# EAGLE board TLC5940Driver (EAGLE 7.2.0)
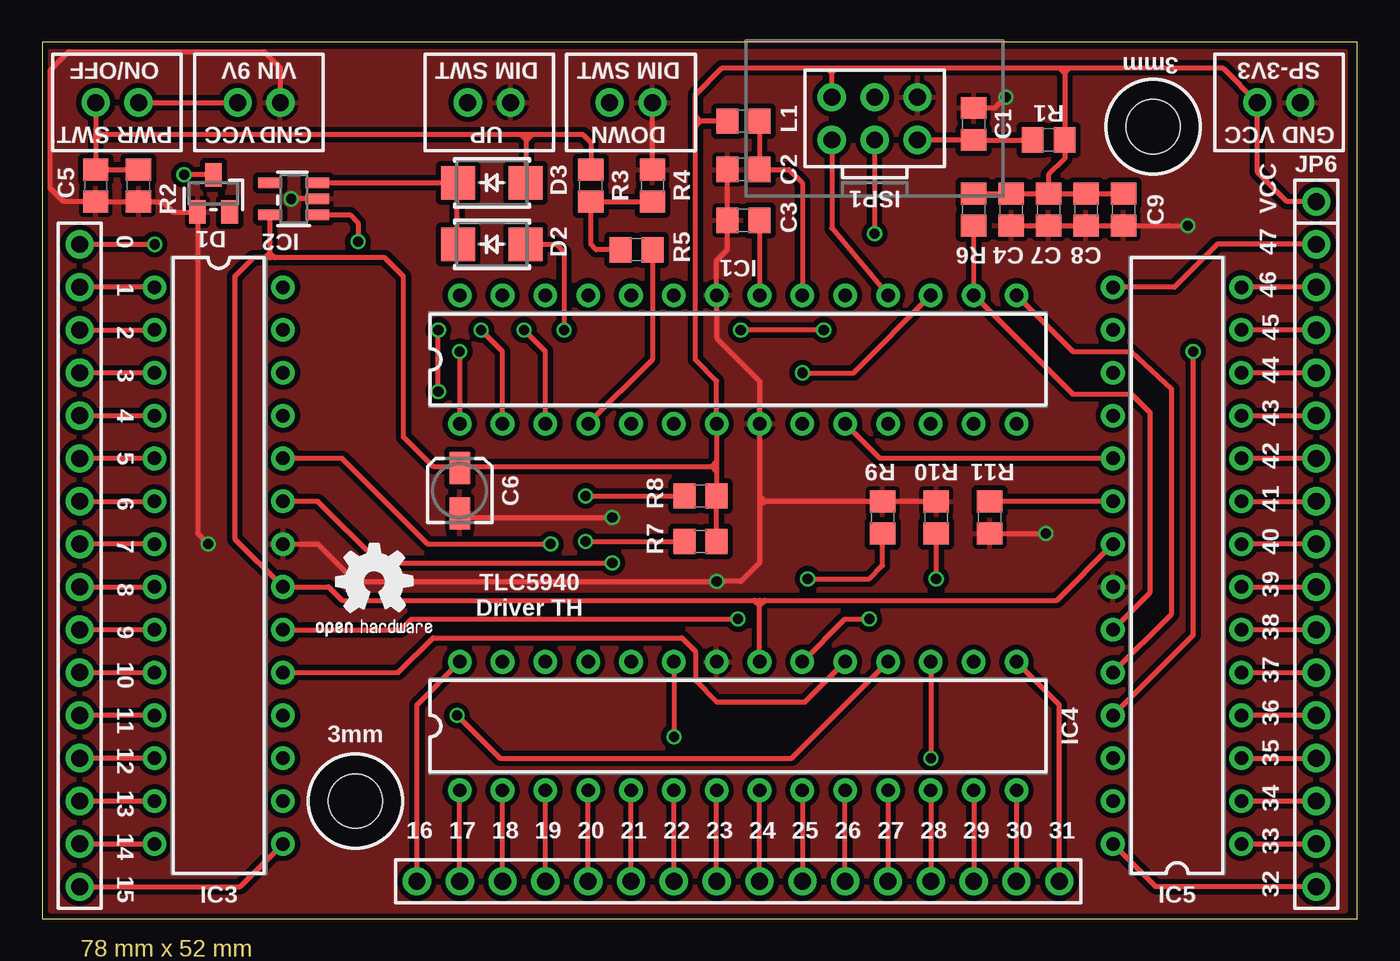
[diagram p0: board, top side]
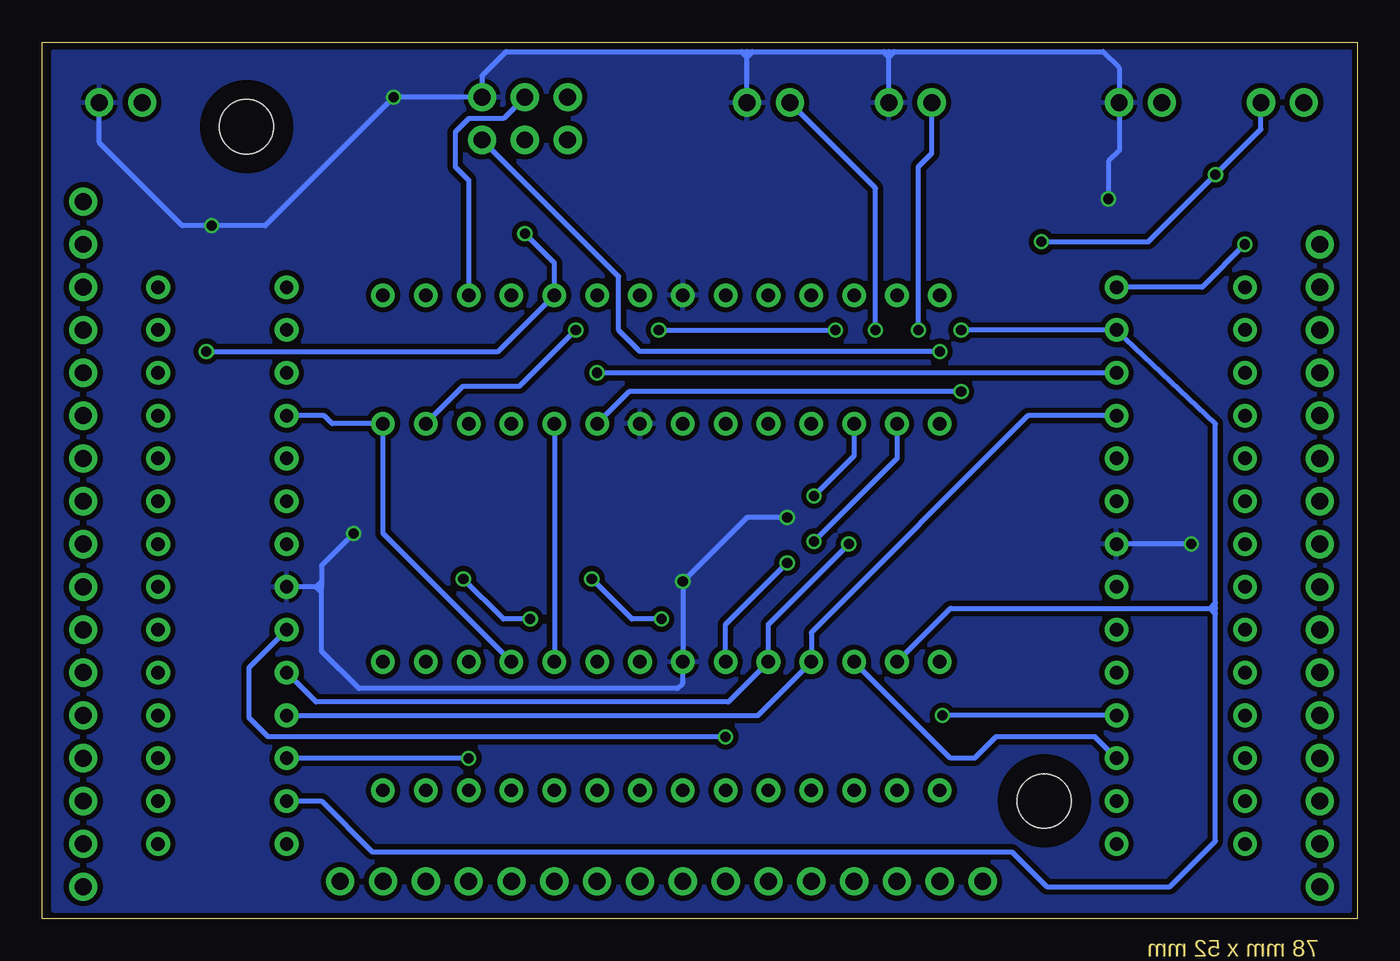
[diagram p1: board, bottom side, seen from below]

Size 78 x 52 mm. Coordinates in mm from the lower left corner, seen from the top.
Outline: 0,0 78,0 78,52 0,52 0,0
Copper layers (1*16): Top 0.018mm / dielectric 1.55mm / Bottom 0.018mm
Design rules "eC_2Layer_PClass6_BaseCopperO18_DNE": minimum track width 0.15mm, minimum drill 0.35mm, track to track 0.15mm, track to pad 0.15mm, pad to pad 0.15mm, via to via 0.15mm, smd to smd 0mil, copper to edge 0.25mm, drill to drill 0.35mm, minimum pad ring 0.175mm, minimum via ring 0.125mm, stop-mask expansion 0mil, vias tented up to drill 0.45mm, thermal gap 0.25mm
Holes 3.2 mm at 65.88,46.99 18.57,6.99
tRestrict: area 16.2,4.6 to 21,9.4; area 63.5,44.6 to 68.3,49.4
bRestrict: area 63.5,44.6 to 68.3,49.4; area 16.2,4.6 to 21,9.4

## Footprints (pad centres in the part's own frame; a part is rotated, then mirrored left to right if it is on the bottom)
P-0805 = smd 1.3 x 1.5: 1 -0.95,0; 2 0.95,0
P-CAPNICHICON-3MM = smd 1.2 x 1.9: 1 0,1.349; 2 0,-1.349
P-SOT23-3 = smd 1 x 1.4: 1 -0.95,-1.1; 2 0.95,-1.1; 3 0,1.1
P-SMA = smd 2 x 2: A -2,0; K 2,0
P-DIL28 = drill 0.8 pad 1.4: 1 -16.51,-3.81; 2 -13.97,-3.81; 3 -11.43,-3.81; 4 -8.89,-3.81; 5 -6.35,-3.81; 6 -3.81,-3.81; 7 -1.27,-3.81; 8 1.27,-3.81; 9 3.81,-3.81; 10 6.35,-3.81; 11 8.89,-3.81; 12 11.43,-3.81; 13 13.97,-3.81; 14 16.51,-3.81; 15 16.51,3.81; 16 13.97,3.81; 17 11.43,3.81; 18 8.89,3.81; 19 6.35,3.81; 20 3.81,3.81; 21 1.27,3.81; 22 -1.27,3.81; 23 -3.81,3.81; 24 -6.35,3.81; 25 -8.89,3.81; 26 -11.43,3.81; 27 -13.97,3.81; 28 -16.51,3.81
P-SOT23-5E = smd 0.6 x 1.4: 1 -0.95,-1.4; 2 0,-1.4; 3 0.95,-1.4; 4 0.95,1.4; 5 -0.95,1.4
P-AVRISPSHROUDED = drill 1 pad 1.676: GND 2.54,1.27; MISO -2.54,-1.27; MOSI 0,1.27; RST 2.54,-1.27; SCK 0,-1.27; VCC -2.54,1.27
P-JST-XH-1X02 = drill 1 pad 1.676: 1 -1.27,0; 2 1.27,0
P-1X16 = drill 1 pad 1.676: 1 -19.05,0; 2 -16.51,0; 3 -13.97,0; 4 -11.43,0; 5 -8.89,0; 6 -6.35,0; 7 -3.81,0; 8 -1.27,0; 9 1.27,0; 10 3.81,0; 11 6.35,0; 12 8.89,0; 13 11.43,0; 14 13.97,0; 15 16.51,0; 16 19.05,0
P-1X01 = drill 1 pad 1.676: 1 0,0
P-JST-XH-1X02-VERT = drill 1 pad 1.676: 1 -1.27,0; 2 1.27,0

## Placement (x,y rotation side)
C1  100nF  [P-0805]  55.24,47.15 90 top
C2  100nF  [P-0805]  41.59,44.45 180 top
C3  100nF  [P-0805]  41.59,41.43 180 top
C4  100nF  [P-0805]  57.47,42.07 270 top
C5  100nF  [P-0805]  3.17,43.5 270 top
C6  2.2uF  [P-CAPNICHICON-3MM]  24.77,25.4 0 top
C7  100nF  [P-0805]  59.69,42.07 270 top
C8  100nF  [P-0805]  61.91,42.07 270 top
C9  100nF  [P-0805]  64.14,42.07 270 top
D1  [P-SOT23-3]  10.16,43.02 0 top
D2  MBRA140  [P-SMA]  26.67,40.01 180 top
D3  MBRA140  [P-SMA]  26.67,43.66 180 top
GOLD_ORB_SM1  OSHWLOGO_GOLD_ORB_SM  [OSHW2]  15.88,15.72 0 top
IC1  ATMEGA88PA  [P-DIL28]  41.27,33.18 0 top
IC2  SPX3819  [P-SOT23-5E]  14.92,42.7 90 top
IC3  TLC5940  [P-DIL28]  10.48,20.95 270 top
IC4  TLC5940  [P-DIL28]  41.27,11.43 0 top
IC5  TLC5940  [P-DIL28]  67.31,20.95 90 top
ISP1  [P-AVRISPSHROUDED]  49.37,47.47 0 top
JP1  [P-JST-XH-1X02]  12.86,48.42 180 top
JP2  [P-JST-XH-1X02]  73.34,48.42 0 top
JP3  [P-1X16]  2.22,20.95 270 top
JP4  [P-1X16]  41.27,2.22 0 top
JP5  [P-1X16]  75.56,20.95 90 top
JP6  [P-1X01]  75.56,42.55 0 top
L1  [P-0805]  41.59,47.31 180 top
R1  4K7  [P-0805]  59.69,46.2 0 top
R2  100K  [P-0805]  5.71,43.5 90 top
R3  27K  [P-0805]  32.54,43.5 90 top
R4  15K  [P-0805]  36.2,43.5 270 top
R5  150R  [P-0805]  35.24,39.69 0 top
R6  10K  [P-0805]  55.24,42.07 90 top
R7  10K  [P-0805]  39.05,22.38 0 top
R8  10K  [P-0805]  39.05,25.08 0 top
R9  7K8  [P-0805]  49.85,23.81 270 top
R10  7K8  [P-0805]  53.02,23.81 270 top
R11  7K8  [P-0805]  56.2,23.81 90 top
SW1  [P-JST-XH-1X02-VERT]  4.45,48.42 180 top
SW2  [P-JST-XH-1X02-VERT]  34.92,48.42 0 top
SW3  [P-JST-XH-1X02-VERT]  26.51,48.42 0 top

## Library data of the parts
C1-C9 D1-D3 IC1-IC5 ISP1 JP1-JP6 L1 R1-R11 SW1-SW3 = dn-electronics
GOLD_ORB_SM1 = bfl

## Nets
GND: C1.2 C2.2 C3.2 C4.2 C5.2 C6.2 C7.2 C8.2 C9.2 D1.1 IC1.8 IC1.22 IC2.2 IC3.22 IC4.22 IC5.22 ISP1.GND JP1.1 JP2.2 R2.1 R4.1 R9.1 R10.1 R11.1 SW2.2 SW3.2
N$1: D1.3 IC2.1 JP1.2 SW1.1
N$2: C5.1 D3.A R2.2 R3.2 SW1.2
N$3: IC3.28 JP3.1
N$4: D2.K D3.K IC2.3
N$5: IC3.1 JP3.2
N$6: IC3.2 JP3.3
N$7: IC3.3 JP3.4
N$8: IC3.4 JP3.5
N$9: IC3.5 JP3.6
N$10: IC3.6 JP3.7
N$11: IC3.7 JP3.8
N$12: IC3.8 JP3.9
N$13: IC3.9 JP3.10
N$14: IC3.10 JP3.11
N$15: IC3.11 JP3.12
N$16: IC3.12 JP3.13
N$17: IC3.13 JP3.14
N$18: IC3.14 JP3.15
N$19: IC3.15 JP3.16
N$20: IC4.28 JP4.1
N$21: IC4.1 JP4.2
N$22: IC4.2 JP4.3
N$23: IC4.3 JP4.4
N$24: IC4.4 JP4.5
N$25: IC4.5 JP4.6
N$26: IC4.6 JP4.7
N$27: IC4.7 JP4.8
N$28: IC4.8 JP4.9
N$29: IC4.9 JP4.10
N$30: IC4.10 JP4.11
N$31: IC4.11 JP4.12
N$32: IC4.12 JP4.13
N$33: IC4.13 JP4.14
N$34: IC4.14 JP4.15
N$35: IC4.15 JP4.16
N$36: IC5.28 JP5.1
N$37: IC5.1 JP5.2
N$38: IC5.2 JP5.3
N$39: IC5.3 JP5.4
N$40: IC5.4 JP5.5
N$41: IC5.5 JP5.6
N$42: IC5.6 JP5.7
N$43: IC5.7 JP5.8
N$44: IC5.8 JP5.9
N$45: IC5.9 JP5.10
N$46: IC5.10 JP5.11
N$47: IC5.11 JP5.12
N$48: IC5.12 JP5.13
N$49: IC5.13 JP5.14
N$50: IC5.14 JP5.15
N$51: IC5.15 JP5.16
N$52: IC1.16 IC3.23 IC4.23 IC5.23 R6.1
N$53: D2.A IC1.13
N$54: IC1.2 R7.1 SW3.1
N$55: C1.1 IC1.1 ISP1.RST R1.1
N$56: C2.1 IC1.20 L1.1
N$57: C3.1 IC1.21
N$58: IC1.19 IC3.25 IC4.25 IC5.25 ISP1.SCK
N$59: IC1.18 ISP1.MISO
N$60: IC1.17 IC3.26 ISP1.MOSI
N$62: IC1.4 R5.2
N$63: IC1.3 R8.1 SW2.1
N$64: IC5.20 R11.2
N$65: IC3.17 IC4.26
N$66: IC4.17 IC5.26
N$67: IC1.15 IC3.24 IC4.24 IC5.24
N$68: IC1.14 IC3.18 IC4.18 IC5.18
N$69: IC1.10 IC3.19 IC4.19 IC5.19
N$70: IC1.9 IC3.27 IC4.27 IC5.27
N$72: IC4.20 R10.2
N$73: R3.1 R4.2 R5.1
N$74: IC3.20 R9.2
VCC: C4.1 C6.1 C7.1 C8.1 C9.1 IC1.7 IC2.5 IC3.21 IC4.21 IC5.21 ISP1.VCC JP2.1 JP6.1 L1.2 R1.2 R6.2 R7.2 R8.2

## Tracks (layer width: path | path; a pad name or v marks a point on that pad's centre or on a via)
GND  (via drill 0.6)
  Top 0.305: C6.2 24.77,23.81 v33.81,23.81 | C2.2 C3.2 40.64,39.69 40.01,39.05 IC1.22 40.01,34.45 42.55,31.91 IC1.8 42.55,25.08 | R10.1 R9.1 42.86,24.77 | R11.1 v59.53,22.86 | IC2.2 v14.76,42.7 | R4.1 SW2.2 | JP1.1 14.13,50.48 13.18,51.44 1.59,51.44 0.48,50.32 0.48,43.34 1.27,42.55 C5.2 R2.1 7.14,42.55 7.78,41.91 D1.1 | C4.2 C7.2 C8.2 C9.2 66.83,41.12 v67.94,41.12 | 42.86,24.77 42.55,24.77 | 42.55,25.08 42.55,24.77 | 9.04,41.91 D1.1 | v9.84,22.23 9.21,22.86 D1.1 | IC3.22 16.35,22.23 18.57,20 v40.01,20 41.43,20 42.55,21.11 42.55,24.45 | 42.55,24.77 42.55,24.45 | 42.55,25.08 42.86,24.77 | 42.86,24.77 42.55,24.45 | C1.2 56.51,48.1 v57.15,48.74
  Bottom 0.305: 61.44,19.37 61.44,15.88 59.21,13.65 40.32,13.65 40.01,13.97 IC4.22 v40.01,20 36.2,23.81 v33.81,23.81 | 61.44,19.37 61.44,19.68 | 61.44,19.68 61.75,19.68 | 61.75,19.68 IC5.22 | v59.53,22.86 61.44,20.95 61.44,20 | 61.44,20 61.44,19.68 | 61.44,19.37 61.75,19.68 | 61.75,19.68 61.44,20 | 36.51,51.44 50.48,51.44 51.91,50.01 ISP1.GND v57.15,48.74 64.77,41.12 v67.94,41.12 69.69,41.12 74.61,46.04 JP2.2 | 36.51,51.44 36.2,51.44 | 36.2,51.44 35.88,51.44 | SW2.2 36.2,51.12 | 36.2,51.12 36.2,51.44 | 35.88,51.44 36.2,51.12 | 36.2,51.12 36.51,51.44 | 35.88,51.44 28.1,51.44 | 28.1,51.44 27.78,51.44 | 27.78,51.44 27.46,51.44 | SW3.2 27.78,51.12 | 27.78,51.12 27.78,51.44 | 27.46,51.44 27.78,51.12 | 27.78,51.12 28.1,51.44 | 27.46,51.44 15.08,51.44 14.13,50.48 JP1.1 14.13,45.56 14.76,44.93 v14.76,42.7 | v9.84,22.23 IC3.22
  pour Bottom (isolate 0.305): 0.48,51.44 0.48,0.48 77.31,0.48 77.31,51.44
  pour Top (isolate 0.305): 0.48,51.44 0.48,0.48 77.31,0.48 77.31,51.44
N$1  (via drill 0.6)
  Top 0.305: SW1.1 JP1.2 | D1.3 10.16,44.13 v8.41,44.13 | IC2.1 18.25,41.75 18.73,41.27 v18.73,40.16
  Bottom 0.305: SW1.1 5.71,46.83 v8.41,44.13 12.38,40.16 v18.73,40.16
N$2
  Top 0.305: 28.42,43.49 28.57,43.66 D3.A | 28.42,43.49 28.73,43.72 | 28.73,43.72 D3.A | 28.57,43.56 D3.A | 28.57,43.75 D3.A | 28.42,43.49 28.57,43.34 | SW1.2 3.17,46.83 | 3.17,46.83 3.17,46.51 | 3.17,46.51 3.17,46.35 | 3.17,46.35 3.17,46.2 | 3.17,46.2 C5.1 R2.2 | 28.73,43.72 28.73,46.2 | 28.73,46.2 28.73,46.51 | 29.05,46.51 32.07,46.51 32.54,46.04 R3.2 | 29.05,46.51 28.73,46.51 | 28.73,46.51 28.42,46.51 | 3.49,46.51 3.17,46.51 | 3.17,46.83 3.49,46.51 | 3.49,46.51 3.17,46.2 | 28.42,46.51 28.73,46.2 | 28.73,46.2 29.05,46.51 | 28.42,46.51 3.33,46.51 3.17,46.35
N$3  (via drill 0.6)
  Top 0.305: JP3.1 v6.67,40.01
  Bottom 0.305: v6.67,40.01 9.21,37.47 IC3.28
N$4
  Top 0.305: D2.K 24.61,40.07 24.61,43.59 D3.K | 23.82,39.85 24.45,39.85 D2.K | 24.77,43.56 D3.K | D3.K 24.77,43.66 | 24.77,39.91 D2.K | IC2.3 D3.K
N$5
  Top 0.305: IC3.1 JP3.2
N$6
  Top 0.305: JP3.3 IC3.2
N$7
  Top 0.305: IC3.3 JP3.4
N$8
  Top 0.305: JP3.5 IC3.4
N$9
  Top 0.305: IC3.5 JP3.6
N$10
  Top 0.305: JP3.7 IC3.6
N$11
  Top 0.305: IC3.7 JP3.8
N$12
  Top 0.305: JP3.9 IC3.8
N$13
  Top 0.305: IC3.9 JP3.10
N$14
  Top 0.305: JP3.11 IC3.10
N$15
  Top 0.305: IC3.11 JP3.12
N$16
  Top 0.305: IC3.12 JP3.13
N$17
  Top 0.305: JP3.14 IC3.13
N$18
  Top 0.305: JP3.15 IC3.14
N$19
  Top 0.305: IC3.15 11.75,1.91 JP3.16
N$20
  Top 0.305: IC4.28 22.23,12.7 JP4.1
N$21
  Top 0.305: JP4.2 IC4.1
N$22
  Top 0.305: JP4.3 IC4.2
N$23
  Top 0.305: JP4.4 IC4.3
N$24
  Top 0.305: JP4.5 IC4.4
N$25
  Top 0.305: JP4.6 IC4.5
N$26
  Top 0.305: JP4.7 IC4.6
N$27
  Top 0.305: JP4.8 IC4.7
N$28
  Top 0.305: JP4.9 IC4.8
N$29
  Top 0.305: IC4.9 JP4.10
N$30
  Top 0.305: JP4.11 IC4.10
N$31
  Top 0.305: IC4.11 JP4.12
N$32
  Top 0.305: IC4.12 JP4.13
N$33
  Top 0.305: IC4.13 JP4.14
N$34
  Top 0.305: IC4.14 JP4.15
N$35
  Top 0.305: IC4.15 60.33,12.7 JP4.16
N$36
  Top 0.305: IC5.28 66.04,1.91 JP5.1
N$37
  Top 0.305: IC5.1 JP5.2
N$38
  Top 0.305: IC5.2 JP5.3
N$39
  Top 0.305: IC5.3 JP5.4
N$40
  Top 0.305: JP5.5 IC5.4
N$41
  Top 0.305: IC5.5 JP5.6
N$42
  Top 0.305: JP5.7 IC5.6
N$43
  Top 0.305: IC5.7 JP5.8
N$44
  Top 0.305: JP5.9 IC5.8
N$45
  Top 0.305: IC5.9 JP5.10
N$46
  Top 0.305: JP5.11 IC5.10
N$47
  Top 0.305: IC5.11 JP5.12
N$48
  Top 0.305: JP5.13 IC5.12
N$49
  Top 0.305: JP5.14 IC5.13
N$50
  Top 0.305: JP5.15 IC5.14
N$51
  Top 0.305: IC5.15 67.15,37.47 69.69,40.01 JP5.16
N$52  (via drill 0.6)
  Top 0.305: IC4.23 v37.47,10.79 | v33.81,21.11 20,21.11 16.35,24.77 IC3.23 | IC5.23 65.72,19.37 65.72,30 64.61,31.11 61.12,31.11 IC1.16 R6.1
  Bottom 0.305: v37.47,10.79 64.61,10.79 65.72,11.91 65.72,14.92 IC5.23 | IC4.23 37.47,17.46 v33.81,21.11
N$53  (via drill 0.6)
  Top 0.305: v46.35,34.92 v41.43,34.92 | 28.73,40.16 D2.A | 28.73,40.07 D2.A | D2.A 30.48,40.01 30.96,39.53 v30.96,34.92
  Bottom 0.305: v41.43,34.92 v30.96,34.92 | IC1.13 53.02,31.59 49.69,31.59 v46.35,34.92
N$54  (via drill 0.6)
  Top 0.305: v32.23,22.38 R7.1 | IC1.2 27.3,33.66 v26.04,34.92
  Bottom 0.305: IC1.2 27.3,27.3 v32.23,22.38 | v26.04,34.92 26.04,44.61 25.24,45.4 SW3.1
N$55  (via drill 0.6)
  Top 0.305: v24.77,33.66 IC1.1 | ISP1.RST C1.1 58.1,46.2 R1.1
  Bottom 0.305: v24.77,33.66 42.55,33.66 43.81,34.92 43.81,38.1 ISP1.RST
N$56
  Top 0.305: IC1.20 45.09,43.66 44.29,44.45 C2.1 L1.1
N$57
  Top 0.305: C3.1 IC1.21
N$58  (via drill 0.6)
  Top 0.305: ISP1.SCK v49.37,40.64 | IC5.25 68.26,16.83 v68.26,33.66
  Bottom 0.305: IC5.25 35.56,12.06 IC4.25 32.38,16.99 19.53,29.84 IC3.25 | v68.26,33.66 50.96,33.66 IC1.19 47.62,38.89 v49.37,40.64
N$59
  Top 0.305: ISP1.MISO 46.83,40.96 IC1.18
N$60  (via drill 0.6)
  Top 0.305: v45.09,32.38 48.1,32.38 IC1.17
  Bottom 0.305: ISP1.MOSI 50.64,47.47 52.7,47.47 53.5,46.67 53.5,44.61 52.7,43.81 IC1.17 | IC3.26 v45.09,32.38
N$62
  Top 0.305: R5.2 36.19,33.18 IC1.4
N$63  (via drill 0.6)
  Top 0.305: v32.23,25.08 R8.1 | IC1.3 29.84,33.66 v28.57,34.92
  Bottom 0.305: v28.57,34.92 28.57,43.34 SW2.1 | IC1.3 29.84,27.46 v32.23,25.08
N$64
  Top 0.305: IC5.20 R11.2
N$65
  Bottom 0.305: IC4.26 24.13,9.53 22.7,9.53 21.43,10.79 15.56,10.79 IC3.17
N$66  (via drill 0.6)
  Top 0.305: IC4.17 v52.7,9.53
  Bottom 0.305: v52.7,9.53 IC5.26
N$67  (via drill 0.6)
  Top 0.305: v30.16,22.23 22.86,22.23 17.78,27.3 IC3.24 | IC5.24 66.99,18.1 66.99,31.43 64.61,33.66 61.12,33.66 IC1.15
  Bottom 0.305: IC5.24 61.75,12.86 37.31,12.86 IC4.24 34.92,17.46 v30.16,22.23
N$68  (via drill 0.6)
  Top 0.305: IC4.18 44.45,9.53 27.15,9.53 v24.61,12.06
  Bottom 0.305: IC3.18 v24.61,12.06 | IC4.18 57.78,22.86 IC1.14 60.8,29.37 61.28,29.84 IC5.18
N$69
  Top 0.305: IC4.19 45.24,12.86 40.01,12.86 38.73,14.13 38.73,15.88 37.94,16.67 23.18,16.67 21.11,14.61 IC3.19 | IC5.19 49.69,27.3 IC1.10
  Bottom 0.305: IC1.10 IC4.19
N$70  (via drill 0.6)
  Top 0.305: v23.5,31.27 v23.5,34.92
  Bottom 0.305: IC5.27 61.44,6.99 58.42,3.97 20.48,3.97 18.41,1.91 11.11,1.91 8.41,4.6 8.41,18.1 | IC4.27 24.13,18.41 8.73,18.41 | 8.73,18.41 8.41,18.41 | 8.41,18.1 8.41,18.41 | 8.41,18.41 8.41,18.73 | 8.41,18.73 8.41,29.37 IC3.27 v23.5,34.92 | 8.41,18.1 8.73,18.41 | 8.73,18.41 8.41,18.73 | v23.5,31.27 43.18,31.27 IC1.9
N$72  (via drill 0.6)
  Top 0.305: IC4.20 47.62,17.78 v49.05,17.78 | v53.02,20.16 R10.2
  Bottom 0.305: v49.05,17.78 50.64,17.78 v53.02,20.16
N$73
  Top 0.305: R4.2 R3.1 32.54,40.01 32.86,39.69 R5.1
N$74  (via drill 0.6)
  Top 0.305: v45.4,20.16 49.05,20.16 49.85,20.95 R9.2 | IC3.20 21.27,17.14 21.91,17.78 v41.27,17.78
  Bottom 0.305: v41.27,17.78 43.02,17.78 v45.4,20.16
VCC
  Top 0.305: 38.73,46.99 38.73,33.18 40.01,31.91 IC1.7 40.01,27.15 | 38.73,46.99 38.73,47.31 | 38.73,47.31 38.73,47.62 | L1.2 39.05,47.31 | 39.05,47.31 38.73,47.31 | 38.73,46.99 39.05,47.31 | 39.05,47.31 38.73,47.62 | 24.84,26.67 C6.1 | 42.23,18.89 42.55,18.89 | 42.55,18.89 42.86,18.89 | 42.86,18.89 60.17,18.89 IC5.21 | IC4.21 42.55,18.57 | 42.55,18.57 42.55,18.89 | 42.23,18.89 42.55,18.57 | 42.55,18.57 42.86,18.89 | R7.2 R8.2 40.01,25.24 40.01,26.51 | 13.52,41.72 13.49,41.75 IC2.5 13.49,41.73 13.49,39.53 | 24.84,26.83 C6.1 | 38.73,47.62 38.73,48.9 40.32,50.48 46.51,50.48 | 46.51,50.48 46.83,50.48 | 46.83,50.48 47.15,50.48 | 47.15,50.48 60.33,50.48 | 60.33,50.48 60.64,50.48 | 60.64,50.48 60.96,50.48 | 60.96,50.48 70.01,50.48 JP2.1 72.07,44.29 73.82,42.55 JP6.1 | 60.64,50.16 60.64,50.48 | R6.2 C4.1 C7.1 | C7.1 C8.1 C9.1 | 60.33,50.48 60.64,50.16 | 60.64,50.16 60.96,50.48 | ISP1.VCC 46.83,50.16 | 46.83,50.16 46.83,50.48 | 46.51,50.48 46.83,50.16 | 46.83,50.16 47.15,50.48 | 13.81,39.21 20.32,39.21 21.43,38.1 21.43,28.57 23.18,26.83 24.69,26.83 | 13.81,39.21 13.49,39.21 | 13.49,39.21 13.18,39.21 | 13.18,39.21 12.54,39.21 11.43,38.1 11.43,22.54 IC3.21 16.99,19.68 17.78,18.89 42.23,18.89 | 13.49,39.53 13.49,39.21 | 13.18,39.21 13.49,39.53 | 13.49,39.53 13.81,39.21 | 40.01,27.15 40.01,26.83 | 40.01,26.83 40.01,26.51 | 24.69,26.83 24.69,26.99 24.77,26.99 24.77,26.83 39.69,26.83 | 39.69,26.83 40.01,26.83 | 24.69,26.83 C6.1 | 40.01,27.15 39.69,26.83 | 39.69,26.83 40.01,26.51 | 60.64,50.16 R1.2 60.64,45.08 59.69,44.13 C7.1

## Text on the board
Dimension: 78 mm x 52 mm
tNames: 3mm | ON/OFF | VIN 9V | DIM SWT | DIM SWT | SP-3V3 | PWR SWT | VCC | GND | UP | DOWN | VCC | GND | VCC | 0 | 47 | 46 | 1 | 2 | 45 | 44 | 3 | 4 | 43 | 5 | 42 | 6 | 41 | 7 | 40 | 8 | 39 | TLC5940 / Driver TH | 9 | 38 | 37 | 10 | 11 | 36 | 3mm | 35 | 12 | 13 | 34 | 16 | 17 | 18 | 19 | 20 | 21 | 22 | 23 | 24 | 25 | 26 | 27 | 28 | 29 | 30 | 31 | 33 | 14 | 15 | 32